# EAGLE board Virtube-Mark2 (EAGLE 7.7.0), part 1 of 2
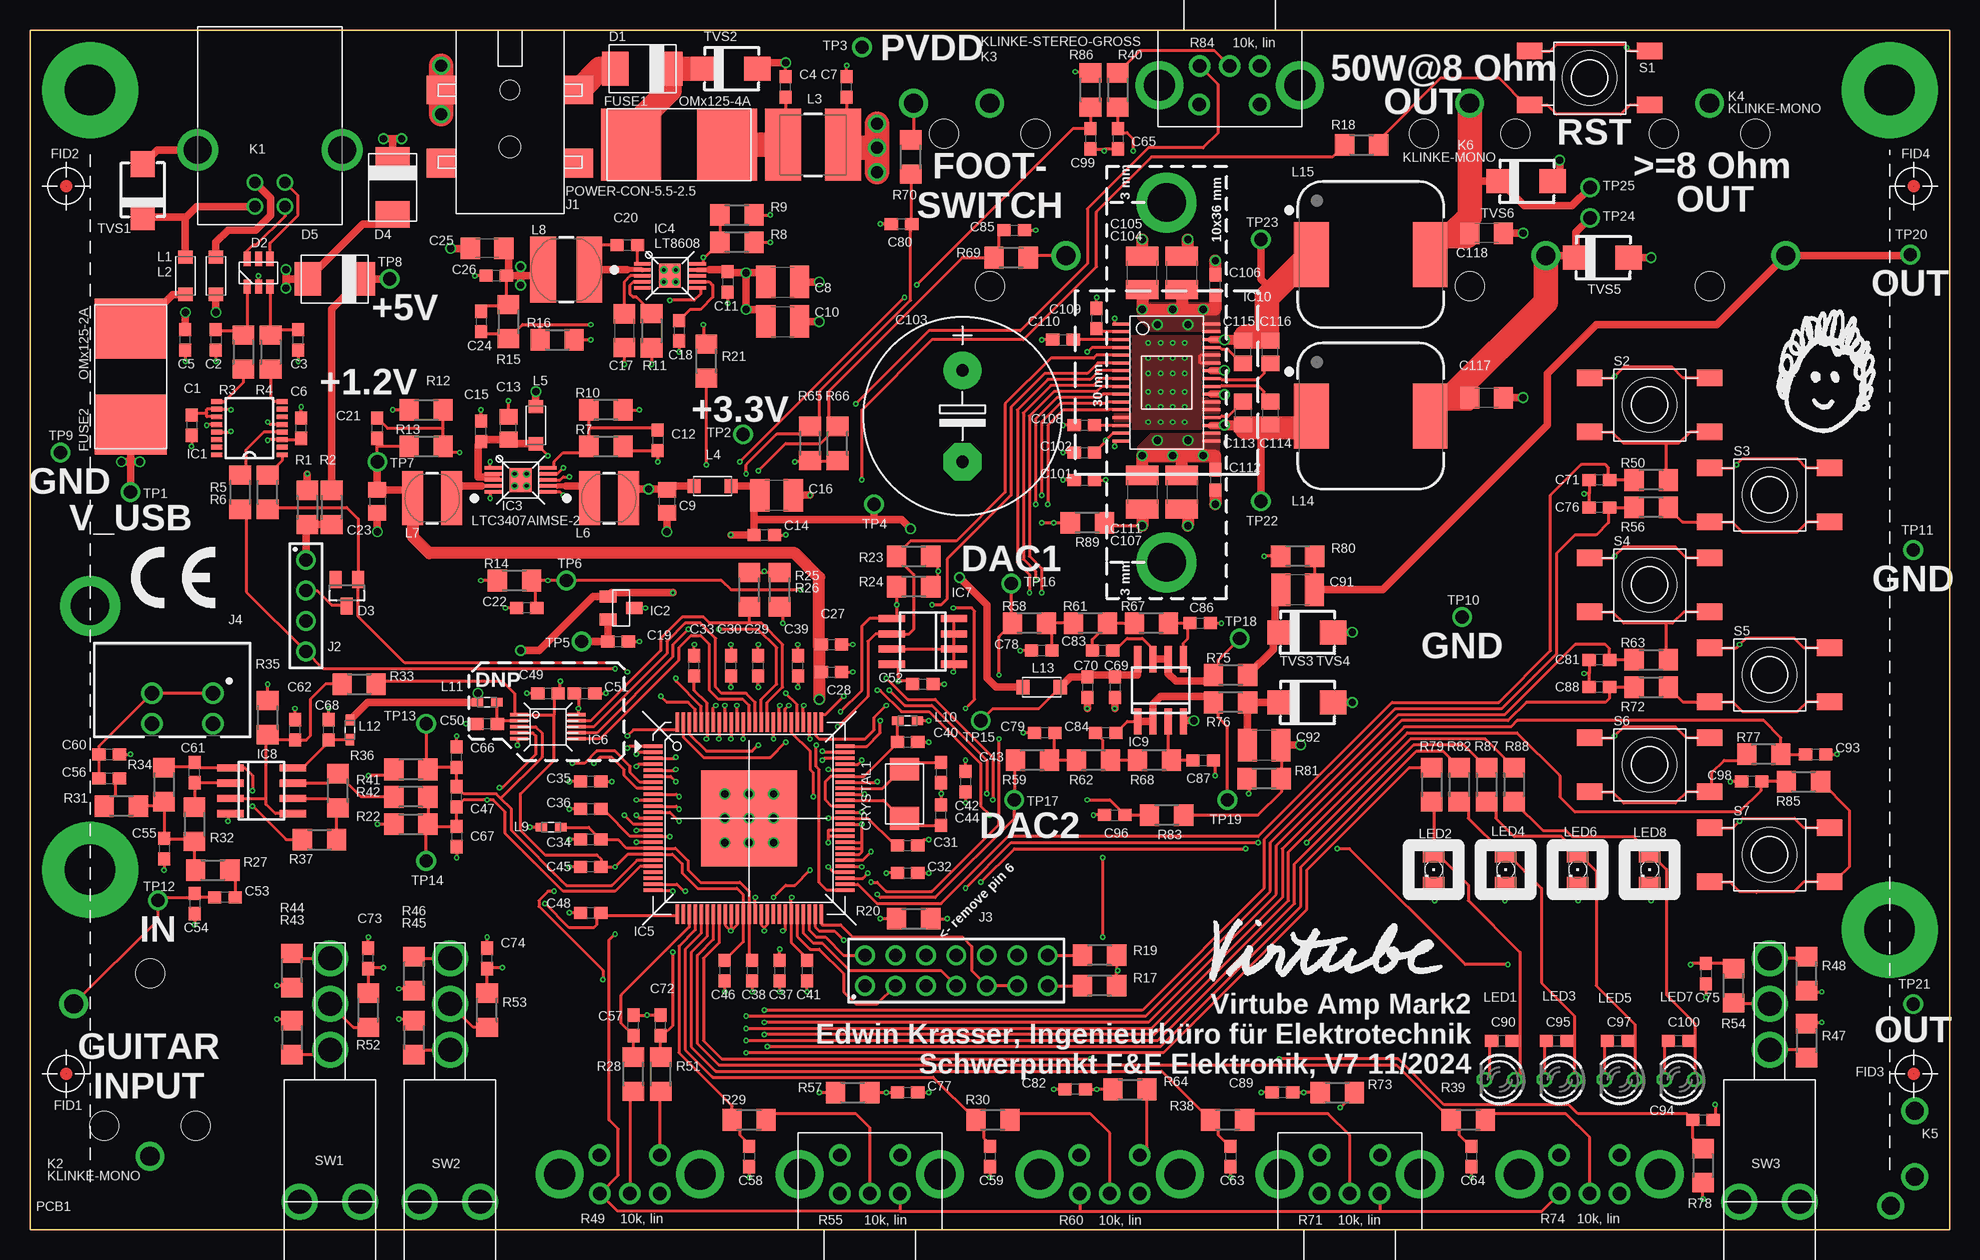
[diagram p0: board, top side]
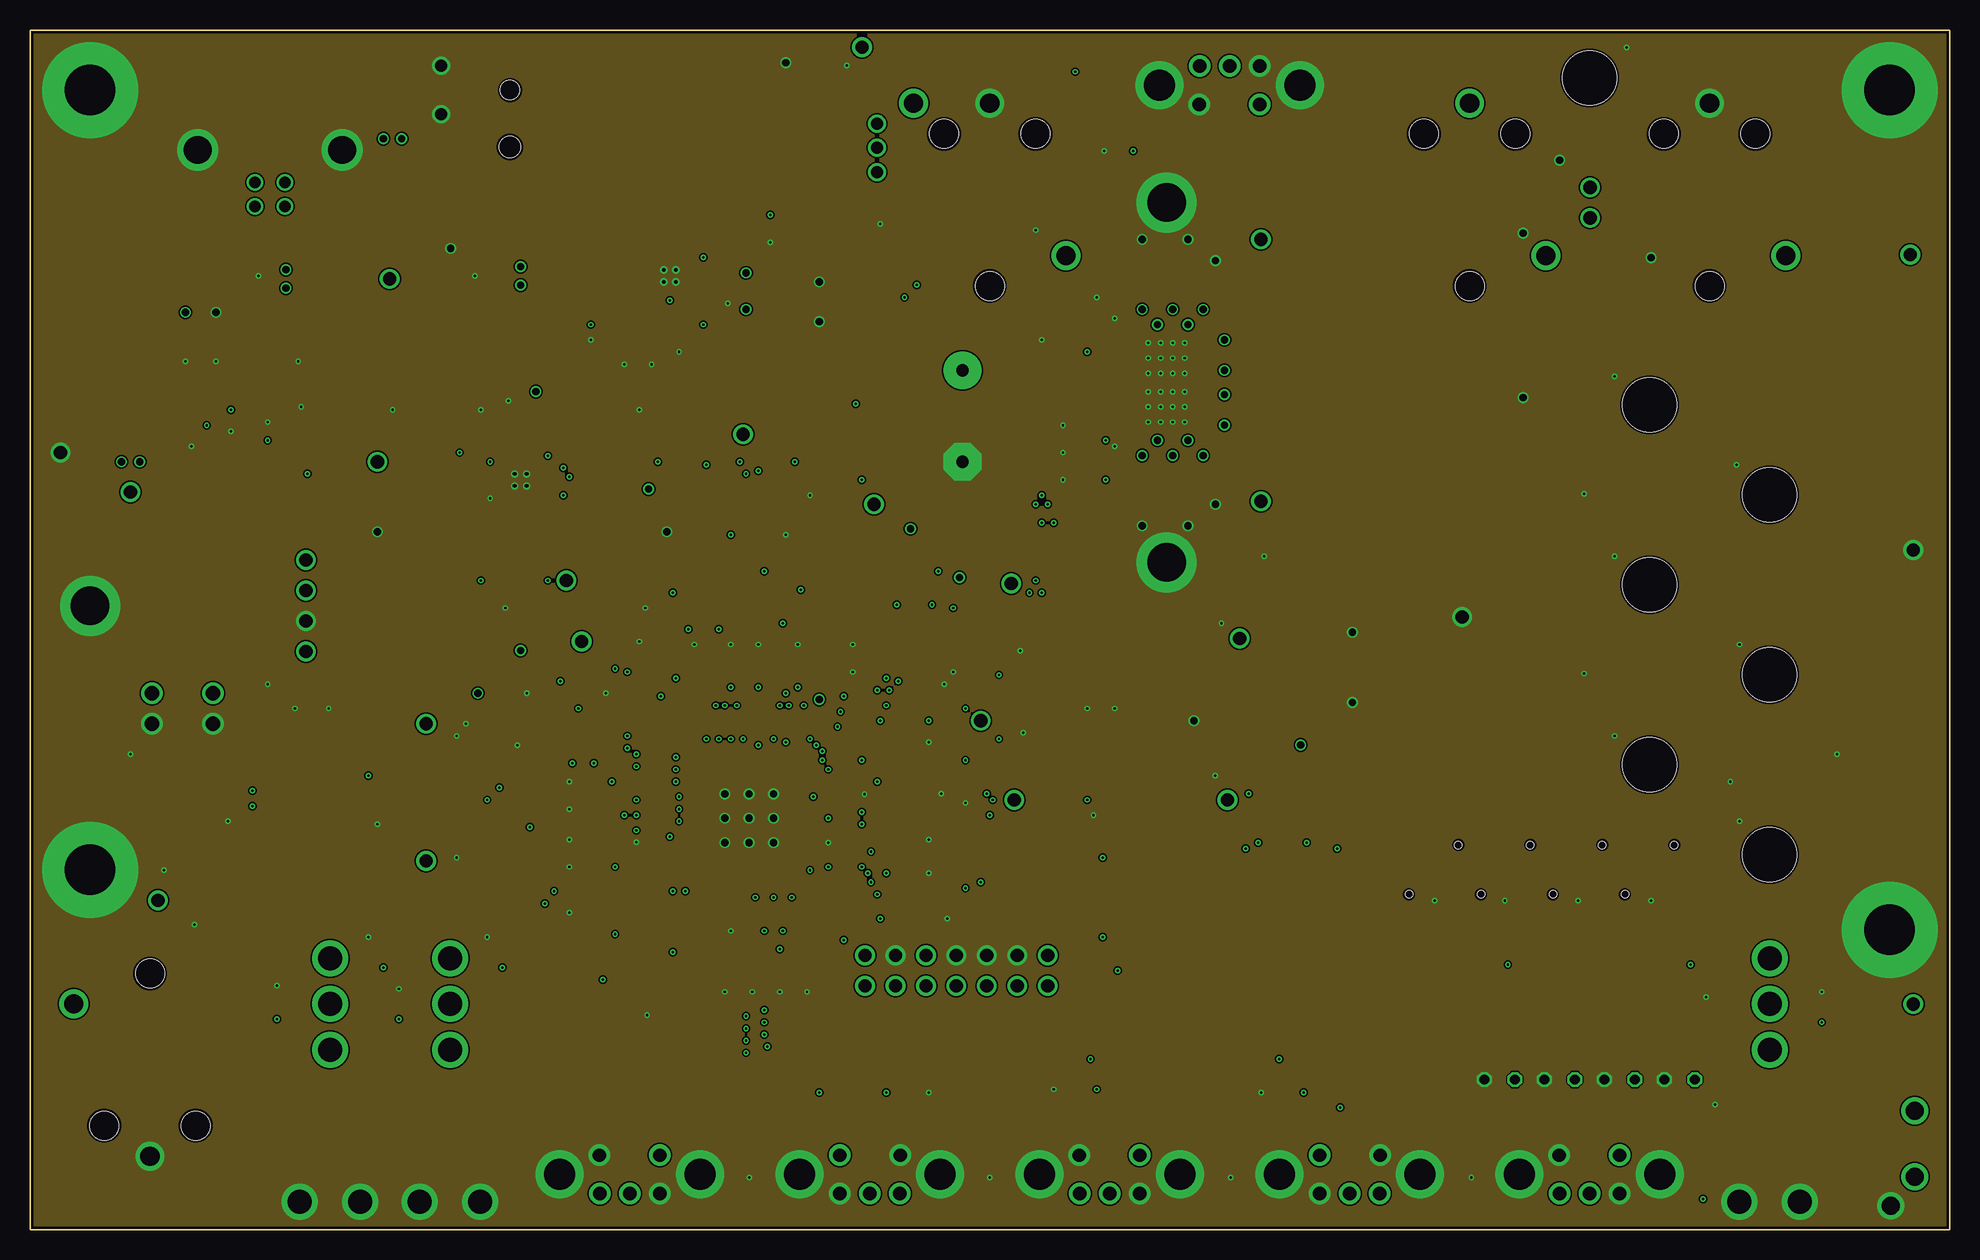
[diagram p1: board, inner layer GND]
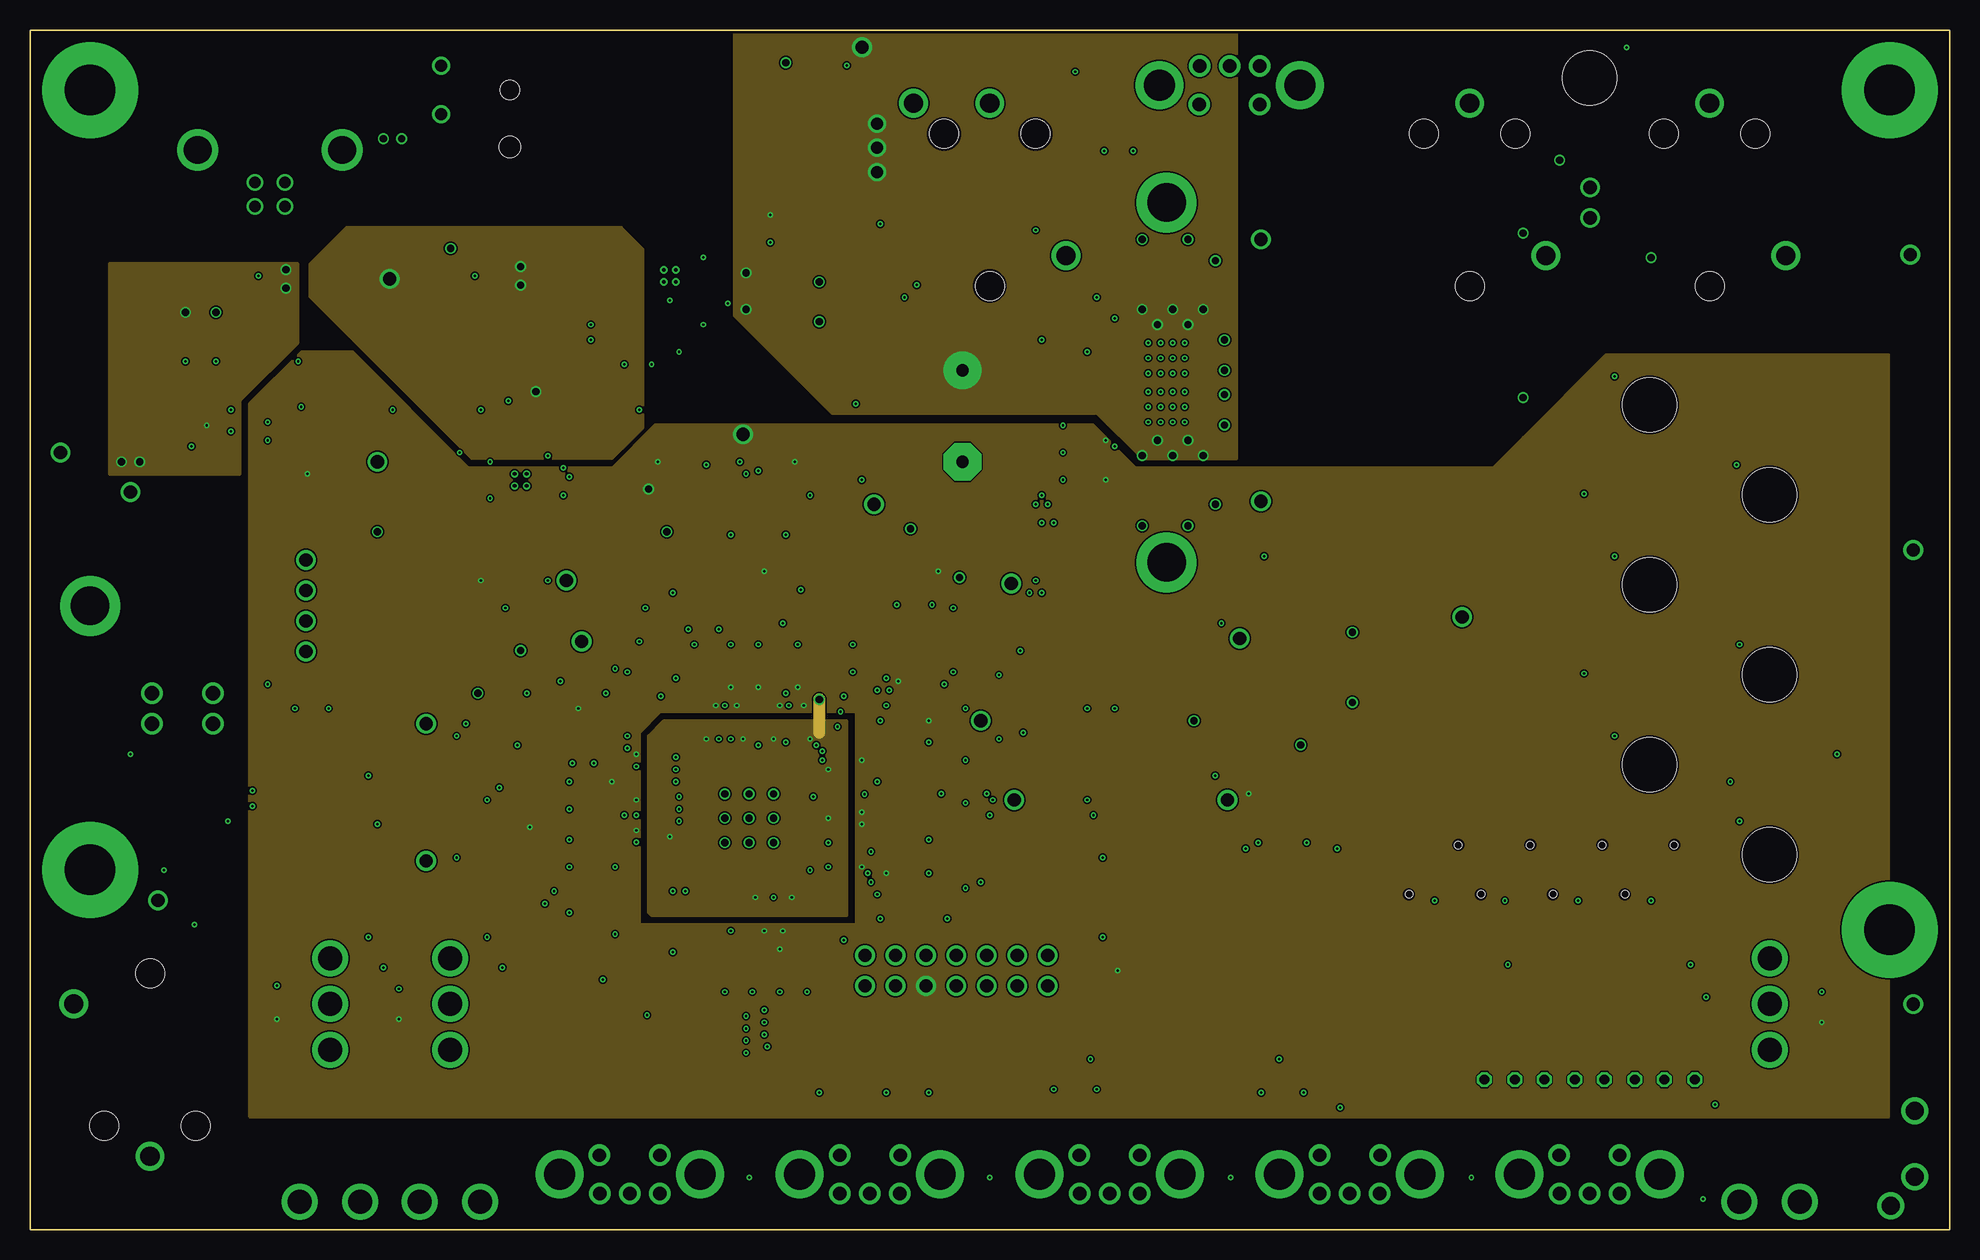
[diagram p2: board, inner layer PWR]
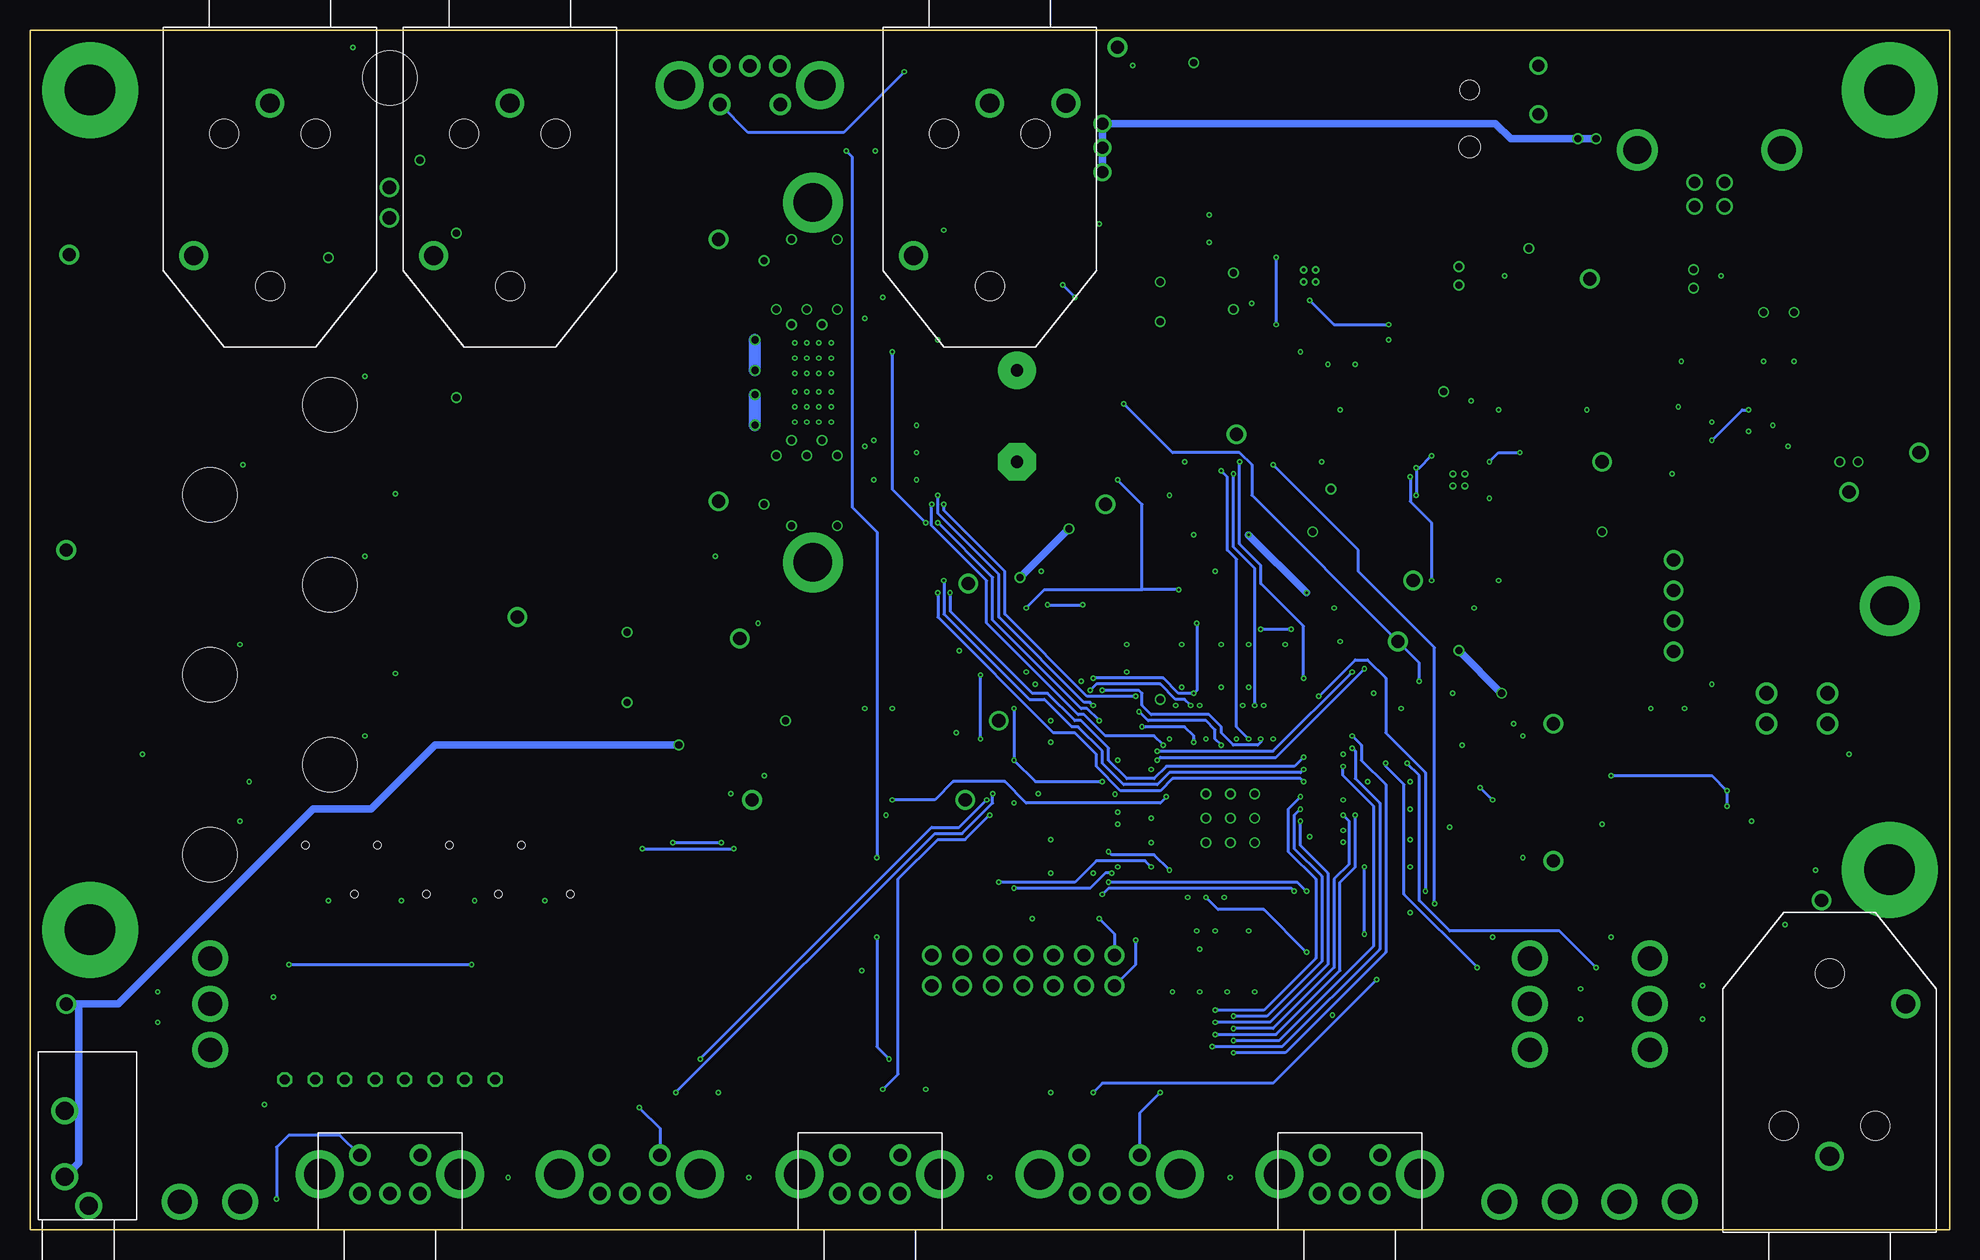
[diagram p3: board, bottom side, seen from below]

Size 160 x 100 mm. Coordinates in mm from the lower left corner, seen from the top.
Copper layers (1+2*3+16): Top 0.018mm / dielectric 0.36mm / GND 0.035mm / dielectric 0.71mm / PWR 0.035mm / dielectric 0.36mm / Bottom 0.018mm
Design rules "Multi-CB_4L_125um-Tracks_OL35um-IL35um": minimum track width 0.125mm, minimum drill 0.2mm, track to track 0.125mm, track to pad 0.125mm, pad to pad 0.125mm, via to via 0.125mm, smd to smd 0mil, copper to edge 0.2mm, drill to drill 0.2mm, minimum pad ring 0.125mm, minimum via ring 0.125mm, stop-mask expansion 2mil, vias tented up to drill 0.45mm, thermal gap 0.2mm
Holes 4.5 mm at 145,61.25 135,53.75 135,38.75 145,31.25 145,46.25 135,68.75 130,96

## Footprints (pad centres in the part's own frame; a part is rotated, then mirrored left to right if it is on the bottom)
C0603 = smd 1.1 x 1: 1 -0.85,0; 2 0.85,0
C1210 = smd 1.6 x 2.7: 1 -1.4,0; 2 1.4,0
C0805 = smd 1.3 x 1.5: 1 -0.95,0; 2 0.95,0
C1206 = smd 1.6 x 1.8: 1 -1.4,0; 2 1.4,0
E7,5-16 = drill 1.016 pad 3.15: + -3.81,0 | drill 1.016 pad 3.15 octagon: - 3.81,0
CRYSTAL5032 = smd 1.9 x 2.4: P$1 -2.05,0; P$2 2.05,0
SMB-CASE403A03 = smd 2.2 x 2.8: A -2.25,0; C 2.25,0
SOT23-6L = smd 0.6 x 1.2: 1 -0.95,-1.15; 2 0,-1.15; 3 0.95,-1.15; 4 0.95,1.15; 5 0,1.15; 6 -0.95,1.15
SOT23 = smd 1 x 1.4: 1 -0.95,-1.1; 2 0.95,-1.1; 3 0,1.1
OMH125 = smd 5 x 6: P$1 -4,0; P$2 4,0
SSOP16 = smd 0.914 x 0.406: 1 -2.718,2.223; 2 -2.718,1.587; 3 -2.718,0.953; 4 -2.718,0.318; 5 -2.718,-0.318; 6 -2.718,-0.953; 7 -2.718,-1.587; 8 -2.718,-2.223; 9 2.718,-2.223; 10 2.718,-1.587; 11 2.718,-0.953; 12 2.718,-0.318; 13 2.718,0.318; 14 2.718,0.953; 15 2.718,1.587; 16 2.718,2.223
SOT23' = smd 1 x 1.4: 1 0.95,1.1; 2 -0.95,1.1; 3 0,-1.1
MSOP10+PAD = smd 0.3 x 1.4: 1 -1,-2.3; 2 -0.5,-2.3; 3 0,-2.3; 4 0.5,-2.3; 5 1,-2.3; 6 1,2.3; 7 0.5,2.3; 8 0,2.3; 9 -0.5,2.3; 10 -1,2.3 | smd 2 x 1.8: PAD 0,0 | drill 0.3 pad 0.6: PAD1 -0.5,-0.5; PAD2 0.5,-0.5; PAD3 0.5,0.5; PAD4 -0.5,0.5
PQFP100_THERMAL = smd 1.6 x 0.3: 1 -8,6; 2 -8,5.5; 3 -8,5; 4 -8,4.5; 5 -8,4; 6 -8,3.5; 7 -8,3; 8 -8,2.5; 9 -8,2; 10 -8,1.5; 11 -8,1; 12 -8,0.5; 13 -8,0; 14 -8,-0.5; 15 -8,-1; 16 -8,-1.5; 17 -8,-2; 18 -8,-2.5; 19 -8,-3; 20 -8,-3.5; 21 -8,-4; 22 -8,-4.5; 23 -8,-5; 24 -8,-5.5; 25 -8,-6; 51 8,-6; 52 8,-5.5; 53 8,-5; 54 8,-4.5; 55 8,-4; 56 8,-3.5; 57 8,-3; 58 8,-2.5; 59 8,-2; 60 8,-1.5; 61 8,-1; 62 8,-0.5; 63 8,0; 64 8,0.5; 65 8,1; 66 8,1.5; 67 8,2; 68 8,2.5; 69 8,3; 70 8,3.5; 71 8,4; 72 8,4.5; 73 8,5; 74 8,5.5; 75 8,6 | smd 0.3 x 1.6: 26 -6,-8; 27 -5.5,-8; 28 -5,-8; 29 -4.5,-8; 30 -4,-8; 31 -3.5,-8; 32 -3,-8; 33 -2.5,-8; 34 -2,-8; 35 -1.5,-8; 36 -1,-8; 37 -0.5,-8; 38 0,-8; 39 0.5,-8; 40 1,-8; 41 1.5,-8; 42 2,-8; 43 2.5,-8; 44 3,-8; 45 3.5,-8; 46 4,-8; 47 4.5,-8; 48 5,-8; 49 5.5,-8; 50 6,-8; 76 6,8; 77 5.5,8; 78 5,8; 79 4.5,8; 80 4,8; 81 3.5,8; 82 3,8; 83 2.5,8; 84 2,8; 85 1.5,8; 86 1,8; 87 0.5,8; 88 0,8; 89 -0.5,8; 90 -1,8; 91 -1.5,8; 92 -2,8; 93 -2.5,8; 94 -3,8; 95 -3.5,8; 96 -4,8; 97 -4.5,8; 98 -5,8; 99 -5.5,8; 100 -6,8 | smd 8 x 8: TH 0,0
VSSOP10 = smd 1.5 x 0.3: 1 -2.4,1; 2 -2.4,0.5; 3 -2.4,0; 4 -2.4,-0.5; 5 -2.4,-1; 6 2.4,-1; 7 2.4,-0.5; 8 2.4,0; 9 2.4,0.5; 10 2.4,1
SO08 = smd 0.6 x 2.2: 1 -1.905,-2.6; 2 -0.635,-2.6; 3 0.635,-2.6; 4 1.905,-2.6; 5 1.905,2.6; 6 0.635,2.6; 7 -0.635,2.6; 8 -1.905,2.6
TSSOP32-TI-NO-TOP-STOP = smd 1.5 x 0.25: 1 -3.75,4.875; 2 -3.75,4.225; 3 -3.75,3.575; 4 -3.75,2.925; 5 -3.75,2.275; 6 -3.75,1.625; 7 -3.75,0.975; 8 -3.75,0.325; 9 -3.75,-0.325; 10 -3.75,-0.975; 11 -3.75,-1.625; 12 -3.75,-2.275; 13 -3.75,-2.925; 14 -3.75,-3.575; 15 -3.75,-4.225; 16 -3.75,-4.875; 17 3.75,-4.875; 18 3.75,-4.225; 19 3.75,-3.575; 20 3.75,-2.925; 21 3.75,-2.275; 22 3.75,-1.625; 23 3.75,-0.975; 24 3.75,-0.325; 25 3.75,0.325; 26 3.75,0.975; 27 3.75,1.625; 28 3.75,2.275; 29 3.75,2.925; 30 3.75,3.575; 31 3.75,4.225; 32 3.75,4.875
POWER-CON-2.5-5.5 = smd 2.4 x 2.4: 1 0,5.75; 1A 6.1,5.75; 2 0,-5.75; 3 6.1,-5.75 | hole 1.6: 0,0 | hole 1.8: 4.75,0
61300411121 = drill 1.1: 1 -3.81,0; 2 -1.27,0; 3 1.27,0; 4 3.81,0
61301421121 = drill 1.1: 1 -7.62,-1.27; 2 -7.62,1.27; 3 -5.08,-1.27; 4 -5.08,1.27; 5 -2.54,-1.27; 6 -2.54,1.27; 7 0,-1.27; 8 0,1.27; 9 2.54,-1.27; 10 2.54,1.27; 11 5.08,-1.27; 12 5.08,1.27; 13 7.62,-1.27; 14 7.62,1.27
691403900002B = drill 1.2: 1 -1.27,2.54; 2 1.27,2.54; A1 -1.27,-2.54; A2 1.27,-2.54
61400416121 = drill 0.92: 1 -1.25,-4.71; 2 1.25,-4.71; 3 1.25,-2.71; 4 -1.25,-2.71 | drill 2.3: Z1 6.02,0; Z2 -6.02,0
KLINKE-GROSS-MONO = drill 1.6: GND 0,-8.89; TIP 6.35,3.81 | hole 2.4: 0,6.35; -3.81,-6.35; 3.81,-6.35
KLINKE-GROSS-STEREO = drill 1.6: GND 0,-8.89; RING -6.35,-8.89; TIP 6.35,3.81 | hole 2.4: 0,6.35; -3.81,-6.35; 3.81,-6.35
KLINKE-KLEIN-STEREO = drill 1.5: 1 0.9,0; 2 -1.1,2.4; 3 -1.1,7.9
WE-CBF_1206(W=4.2) = smd 1.1 x 1.2: 1 -1.55,0; 2 1.55,0
WE-SUKW_7427511 = smd 3 x 6: 1 -2.5,0; 2 2.5,0
WE-PD2_4532 = smd 1.75 x 4.5: 1 -1.625,0; 2 1.625,0
WE-PD2_5848 = smd 2.15 x 5.5: 1 -1.925,0; 2 1.925,0
WE-CBF_0603(W=2.6) = smd 0.95 x 0.7: 1 -0.825,0; 2 0.825,0
WE-PD_1210 = smd 5.4 x 2.9: 1 0,-4.95; 2 0,4.95
LED3MM = drill 0.813 octagon: A -1.27,0; K 1.27,0
1206 = smd 1.6 x 1.803: A -1.422,0; C 1.422,0
LIGHTPIPE_3MM = hole 0.6: -2.05,-2.05; 2.05,2.05
PCB-160X100-4-ALT1 = drill 4.2 pad 8: P$1 5,30; P$2 155,25; P$3 155,95; P$4 5,95
R1206 = smd 1.6 x 1.803: 1 -1.422,0; 2 1.422,0
R-POT1-KEY = drill 1.1 pad 1.778: 1 -2.5,0; 2 0,0; 3 2.5,0; K1 -2.5,3.2; K2 2.54,3.2 | drill 2.6 pad 4: L1 -5.85,1.6; L2 5.85,1.6
LSH_SCHURTER = smd 2.1 x 1.4: A1 -5,2.25; A2 5,2.25; B1 -5,-2.25; B2 5,-2.25
SPDT-KIPPSCHALTER = drill 2: L1 -2.54,-12.7; L2 2.54,-12.7; P$1 0,0; P$2 0,3.81; P$3 0,7.62
TESTPOINT = drill 1.1: P$1 0,0
SMA-DO214 = smd 2.2 x 2: A 2.2,0; C -2.2,0

## Placement (x,y rotation side)
C1  100n  [C0603]  13.46,67.06 270 top
C2  47p  [C0603]  15.49,74.17 270 top
C3  47p  [C0603]  22.35,74.17 90 top
C4  10n  [C0603]  62.99,95.25 90 top
C5  100n  [C0603]  12.95,74.17 90 top
C6  100n  [C0603]  22.61,66.8 90 top
C7  10n  [C0603]  68.07,95.25 90 top
C8  10u, 50V  [C1210]  62.74,78.99 0 top
C9  10u, 16V  [C0805]  53.09,60.71 270 top
C10  10u, 50V  [C1210]  62.74,75.69 0 top
C11  100n  [C0603]  58.17,78.99 270 top
C12  22p  [C0603]  52.32,65.79 270 top
C13  10u, 16V  [C0805]  39.88,66.8 90 top
C14  100n  [C0603]  61.21,57.91 0 top
C15  100n  [C0603]  37.59,66.55 90 top
C16  100u  [C1210]  62.23,61.21 0 top
C17  10u  [C1206]  49.53,74.93 270 top
C18  100n  [C0603]  54.1,74.93 270 top
C19  100n  [C0603]  49.02,49.02 0 top
C20  100n  [C0603]  49.78,82.04 180 top
C21  22p  [C0603]  28.96,66.8 90 top
C22  1n  [C0603]  41.4,51.82 180 top
C23  10u, 16V  [C0805]  28.96,60.71 270 top
C24  10p  [C0603]  37.59,75.69 270 top
C25  10u  [C1206]  38.1,81.79 180 top
C26  100n  [C0603]  38.86,79.5 180 top
C27  10u  [C0603]  66.8,48.77 0 top
C28  100n  [C0603]  66.8,46.48 0 top
C29  10u  [C0603]  60.71,46.99 90 top
C30  100n  [C0603]  58.42,46.99 90 top
C31  100n  [C0603]  73.15,32 0 top
C32  100n  [C0603]  73.15,29.72 0 top
C33  100n  [C0603]  55.37,46.99 90 top
C34  10u  [C0603]  46.74,32.51 180 top
C35  100n  [C0603]  46.74,37.34 180 top
C36  100n  [C0603]  46.74,35.05 180 top
C37  100n  [C0603]  62.48,21.59 270 top
C38  10u  [C0603]  60.2,21.59 270 top
C39  100n  [C0603]  64.01,46.99 90 top
C40  100n  [C0603]  73.15,40.64 0 top
C41  100n  [C0603]  64.77,21.59 270 top
C42  22p  [C0603]  75.95,38.1 270 top
C43  10n  [C0603]  77.98,37.34 270 top
C44  22p  [C0603]  75.95,34.54 90 top
C45  10u  [C0603]  46.74,30.23 180 top
C46  10u  [C0603]  57.91,21.59 270 top
C47  47p  [C0603]  35.56,36.07 90 top
C48  10n  [C0603]  46.74,26.42 0 top
C49  10u  [C0603]  43.18,44.7 0 top
C50  1u  [C0603]  38.1,42.16 180 top
C51  1u  [C0603]  46.23,44.7 0 top
C52  100n  [C0603]  74.42,45.47 0 top
C53  1u  [C0603]  16.26,27.69 180 top
C54  100p  [C0603]  13.72,27.18 270 top
C55  470p  [C0603]  11.18,31.75 270 top
C56  1u  [C0603]  6.6,37.59 180 top
C57  10n  [C0603]  50.29,17.02 90 top
C58  10n  [C0603]  59.94,6.1 270 top
C59  10n  [C0603]  80.01,6.1 270 top
C60  100p  [C0603]  6.6,39.62 0 top
C61  100p  [C0603]  13.72,38.1 90 top
C62  1u  [C0603]  22.1,41.66 90 top
C63  10n  [C0603]  100.08,6.1 270 top
C64  10n  [C0603]  120.14,6.1 270 top
C65  10n  [C0603]  90.68,90.93 270 top
C66  100p  [C0603]  35.56,39.37 90 top
C67  100p  [C0603]  35.56,32.77 270 top
C68  100n  [C0603]  24.89,41.66 90 top
C69  100n  [C0603]  90.42,45.21 270 top
C70  10u  [C0603]  88.14,45.21 270 top
C71  10n  [C0603]  130.81,62.48 180 top
C72  10n  [C0603]  52.58,17.02 90 top
C73  10n  [C0603]  28.19,22.61 90 top
C74  10n  [C0603]  38.1,22.61 90 top
C75  10n  [C0603]  139.7,21.34 270 top
C76  10n  [C0603]  130.81,60.2 180 top
C77  10n  [C0603]  73.15,11.43 0 top
C78  1n  [C0603]  84.33,48.26 180 top
C79  1n  [C0603]  84.58,41.4 180 top
C80  10n  [C0603]  72.64,83.82 180 top
C81  10n  [C0603]  130.81,47.5 180 top
C82  10n  [C0603]  87.12,11.68 180 top
C83  1n  [C0603]  89.41,48.26 180 top
C84  1n  [C0603]  89.66,41.4 180 top
C85  10n  [C0603]  82.04,83.31 0 top
C86  100p  [C0603]  97.54,50.55 0 top
C87  100p  [C0603]  97.79,39.12 0 top
C88  10n  [C0603]  130.81,45.21 180 top
C89  10n  [C0603]  104.39,11.43 180 top
C90  1n  [C0603]  122.68,15.75 0 top
C91  100u  [C1210]  105.66,53.34 0 top
C92  100u  [C1210]  102.87,40.39 0 top
C93  10n  [C0603]  148.84,39.62 0 top
C94  10n  [C0603]  139.45,9.14 0 top
C95  1n  [C0603]  127.25,15.75 0 top
C96  10u  [C0603]  90.42,34.54 0 top
C97  1n  [C0603]  132.33,15.75 0 top
C98  10n  [C0603]  143.51,37.34 180 top
C99  10n  [C0603]  88.39,90.93 270 top
C100  1n  [C0603]  137.41,15.75 0 top
C101  10u  [C0603]  87.88,62.48 0 top
C102  100n  [C0603]  87.88,64.77 0 top
C103  1000uF, 35V  [E7,5-16]  77.72,67.82 270 top
C104  10u, 50V  [C1210]  96.01,79.76 90 top
C105  10u, 50V  [C1210]  92.71,79.76 90 top
C106  100n  [C0603]  98.81,78.74 90 top
C107  10u, 50V  [C1210]  96.01,61.47 270 top
C108  1u  [C0603]  87.88,67.06 0 top
C109  1u  [C0603]  88.9,75.95 270 top
C110  1u  [C0603]  86.11,74.17 0 top
C111  10u, 50V  [C1210]  92.71,61.47 270 top
C112  100n  [C0603]  98.81,62.48 270 top
C113  470n, 50V  [C0805]  101.09,68.07 270 top
C114  470n, 50V  [C0805]  103.38,68.07 270 top
C115  470n, 50V  [C0805]  101.09,73.15 90 top
C116  470n, 50V  [C0805]  103.38,73.15 90 top
C117  680n, 50V  [C1206]  121.41,69.34 0 top
C118  680n, 50V  [C1206]  121.41,83.06 180 top
CE1  CE-MARKING  [CE-5MM-MIN-SIZE]  10.92,54.36 0 top
CRYSTAL1  NX5032GA-10M  [CRYSTAL5032]  72.9,36.32 270 top
D1  SK54BL  [SMB-CASE403A03]  51.05,96.77 0 top
D2  USBLC6-2  [SOT23-6L]  19.05,79.76 0 top
D3  BAS70  [SOT23]  26.42,53.09 180 top
D4  VS-10BQ040  [SMB-CASE403A03]  30.23,86.87 90 top
D5  VS-10BQ040  [SMB-CASE403A03]  25.4,79.25 0 top
FID1  FIDUCIAL  [FIDUCIAL]  3,13 0 top
FID2  FIDUCIAL  [FIDUCIAL]  3,87 0 top
FID3  FIDUCIAL  [FIDUCIAL]  157,13 0 top
FID4  FIDUCIAL  [FIDUCIAL]  157,87 0 top
FUSE1  OMx125-4A  [OMH125]  54.1,90.42 0 top
FUSE2  OMx125-2A  [OMH125]  8.38,71.12 270 top
IC1  FT230XS  [SSOP16]  18.29,66.8 180 top
IC2  ADR381  [SOT23']  49.28,51.82 90 top
IC3  LTC3407AIMSE-2  [MSOP10+PAD]  40.89,62.48 270 top
IC4  LT8608  [MSOP10+PAD]  53.34,79.5 270 top
IC5  TMS320F28377SPZP  [PQFP100_THERMAL]  59.94,34.29 0 top
IC6  ADS8867IDGS  [VSSOP10]  43.18,41.91 0 top
IC7  24AA64-I/SN  [SO08]  74.42,49.02 90 top
IC8  AD8606  [SO08]  19.3,36.58 270 top
IC9  AD8616  [SO08]  94.23,44.96 0 top
IC10  TAS5828M  [TSSOP32-TI-NO-TOP-STOP]  94.74,70.61 0 top
J1  POWER-CON-5.5-2.5  [POWER-CON-2.5-5.5]  40,95 270 top
J2  61300411121  [61300411121]  23,52 270 top
J3  61301421121  [61301421121]  77.22,21.59 0 top
J4  691403900002B  [691403900002B]  12.7,43.43 270 top
K1  K_USB  [61400416121]  20,90 0 top
K2  KLINKE-MONO  [KLINKE-GROSS-MONO]  10,15 0 bottom
K3  KLINKE-STEREO-GROSS  [KLINKE-GROSS-STEREO]  80,85 180 bottom
K4  KLINKE-MONO  [KLINKE-GROSS-MONO]  140,85 180 bottom
K5  KLINKE-STEREO-KLEIN  [KLINKE-KLEIN-STEREO]  156,2 0 bottom
K6  KLINKE-MONO  [KLINKE-GROSS-MONO]  120,85 180 bottom
L1  600@100M,2A  [WE-CBF_1206(W=4.2)]  12.95,79.5 90 top
L2  600@100M,2A  [WE-CBF_1206(W=4.2)]  15.49,79.5 90 top
L3  416Ohm@100MHz  [WE-SUKW_7427511]  65.28,90.42 0 top
L4  600@100M,2A  [WE-CBF_1206(W=4.2)]  56.9,61.98 180 top
L5  600@100M,2A  [WE-CBF_1206(W=4.2)]  42.16,67.06 90 top
L6  4.7uH  [WE-PD2_4532]  48.26,60.96 0 top
L7  4.7uH  [WE-PD2_4532]  33.53,60.96 180 top
L8  10uH  [WE-PD2_5848]  44.7,80.01 180 top
L9  1k@100M  [WE-CBF_0603(W=2.6)]  43.43,33.53 0 top
L10  1k@100M  [WE-CBF_0603(W=2.6)]  73.15,42.42 180 top
L11  1k@100M  [WE-CBF_0603(W=2.6)]  38.1,43.94 180 top
L12  1k@100M  [WE-CBF_0603(W=2.6)]  26.67,41.66 90 top
L13  600@100M,2A  [WE-CBF_1206(W=4.2)]  84.33,45.21 180 top
L14  10uH  [WE-PD_1210]  111.76,67.82 270 top
L15  10uH  [WE-PD_1210]  111.76,81.28 270 top
LED1  ROT  [LED3MM]  122.5,12.5 180 top
LED2  nb  [1206]  117,30 270 top
LED3  GRÜN  [LED3MM]  127.5,12.5 180 top
LED4  nb  [1206]  123,30 270 top
LED5  GRÜN  [LED3MM]  132.5,12.5 180 top
LED6  nb  [1206]  129,30 270 top
LED7  ROT  [LED3MM]  137.5,12.5 180 top
LED8  nb  [1206]  135,30 270 top
LOGO1  LOGO1  [LOGO1]  149.61,70.1 0 top
LP1  nb  [LIGHTPIPE_3MM]  117,30 0 top
LP2  nb  [LIGHTPIPE_3MM]  123,30 0 top
LP3  nb  [LIGHTPIPE_3MM]  129,30 0 top
LP4  nb  [LIGHTPIPE_3MM]  135,30 0 top
PCB1  PCB-160X100-ALT1  [PCB-160X100-4-ALT1]  0,0 0 top
R1  0  [R1206]  23.11,60.2 90 top
R2  nb  [R1206]  25.15,60.2 90 top
R3  27  [R1206]  17.78,73.15 90 top
R4  27  [R1206]  20.07,73.15 90 top
R5  3.3k  [R1206]  19.81,61.47 270 top
R6  3.3k  [R1206]  17.53,61.47 270 top
R7  1Meg  [R1206]  48.01,65.28 180 top
R8  180k  [R1206]  58.93,84.58 180 top
R9  22k  [R1206]  58.93,82.3 0 top
R10  220k  [R1206]  48.01,68.33 0 top
R11  43k  [R1206]  51.82,74.93 90 top
R12  560k  [R1206]  33.02,68.33 180 top
R13  560k  [R1206]  33.02,65.28 180 top
R14  10k  [R1206]  40.39,54.1 0 top
R15  1Meg  [R1206]  39.88,75.69 90 top
R16  180k  [R1206]  43.94,74.17 180 top
R17  4.7k  [R1206]  89.15,20.32 0 top
R18  100  [R1206]  111,90.42 180 top
R19  4.7k  [R1206]  89.15,22.86 0 top
R20  2.2k  [R1206]  73.66,25.91 180 top
R21  100k  [R1206]  56.39,72.39 270 top
R22  nb/100  [R1206]  31.75,33.78 180 top
R23  3.3k  [R1206]  73.66,56.13 180 top
R24  3.3k  [R1206]  73.66,53.59 0 top
R25  10k  [R1206]  62.48,53.34 270 top
R26  10k  [R1206]  59.94,53.34 270 top
R27  100k  [R1206]  15.24,29.97 180 top
R28  1k  [R1206]  50.29,12.95 270 top
R29  1k  [R1206]  59.94,9.14 0 top
R30  1k  [R1206]  80.26,9.14 0 top
R31  220k  [R1206]  7.62,35.31 0 top
R32  100k  [R1206]  13.72,33.78 90 top
R33  100k  [R1206]  27.43,45.47 180 top
R34  100k  [R1206]  11.18,37.08 90 top
R35  100k  [R1206]  19.81,42.67 90 top
R36  10k  [R1206]  25.65,36.58 270 top
R37  10k  [R1206]  24.13,32.51 180 top
R38  1k  [R1206]  99.82,9.14 0 top
R39  1k  [R1206]  119.89,9.14 0 top
R40  1k  [R1206]  90.68,95 90 top
R41  100  [R1206]  31.75,38.35 0 top
R42  100  [R1206]  31.75,36.07 0 top
R43  nb  [R1206]  21.84,16 90 top
R44  1k  [R1206]  21.84,21.59 270 top
R45  nb  [R1206]  32,16 90 top
R46  1k  [R1206]  32,21.34 270 top
R47  nb  [R1206]  148.08,15.75 90 top
R48  1k  [R1206]  148.08,21.34 270 top
R49  10k, lin  [R-POT1-KEY]  50,3 0 bottom
R50  1k  [R1206]  135.13,62.48 0 top
R51  1k  [R1206]  52.58,12.95 270 top
R52  1k  [R1206]  28.19,18.29 270 top
R53  1k  [R1206]  38.1,18.29 270 top
R54  1k  [R1206]  141.99,20.32 270 top
R55  10k, lin  [R-POT1-KEY]  70,3 0 top
R56  1k  [R1206]  135.13,60.2 0 top
R57  1k  [R1206]  68.58,11.43 180 top
R58  10k  [R1206]  83.31,50.55 0 top
R59  22k  [R1206]  83.57,39.12 0 top
R60  10k, lin  [R-POT1-KEY]  90,3 0 bottom
R61  22k  [R1206]  88.39,50.55 0 top
R62  43k  [R1206]  88.65,39.12 0 top
R63  1k  [R1206]  135.13,47.5 180 top
R64  1k  [R1206]  91.69,11.68 180 top
R65  nb  [R1206]  65.02,65.53 270 top
R66  nb  [R1206]  67.31,65.53 270 top
R67  43k  [R1206]  93.47,50.55 0 top
R68  68k  [R1206]  93.73,39.12 0 top
R69  1k  [R1206]  81.79,81.03 180 top
R70  1k  [R1206]  73.41,89.41 270 top
R71  10k, lin  [R-POT1-KEY]  110,3 0 top
R72  1k  [R1206]  135.13,45.21 180 top
R73  1k  [R1206]  108.97,11.43 180 top
R74  10k, lin  [R-POT1-KEY]  130,3 0 bottom
R75  1  [R1206]  100.08,46.23 0 top
R76  1  [R1206]  100.08,43.94 0 top
R77  1k  [R1206]  144.53,39.62 0 top
R78  1k  [R1206]  139.45,5.33 90 top
R79  1k  [R1206]  116.84,37.08 90 top
R80  10k  [R1206]  105.66,56.13 0 top
R81  10k  [R1206]  102.87,37.59 0 top
R82  1k  [R1206]  119.13,37.08 90 top
R83  2.2k  [R1206]  94.74,34.54 0 top
R84  10k, lin  [R-POT1-KEY]  100,97 180 top
R85  1k  [R1206]  147.83,37.34 180 top
R86  1k  [R1206]  88.39,95 270 top
R87  1k  [R1206]  121.41,37.08 90 top
R88  1k  [R1206]  123.7,37.08 90 top
R89  3.3k  [R1206]  88.14,58.93 0 top
S1  LSH_SCHURTER  [LSH_SCHURTER]  130,96 0 top
S2  LSH_SCHURTER  [LSH_SCHURTER]  135,68.75 0 top
S3  LSH_SCHURTER  [LSH_SCHURTER]  145,61.25 0 top
S4  LSH_SCHURTER  [LSH_SCHURTER]  135,53.75 0 top
S5  LSH_SCHURTER  [LSH_SCHURTER]  145,46.25 0 top
S6  LSH_SCHURTER  [LSH_SCHURTER]  135,38.75 0 top
S7  LSH_SCHURTER  [LSH_SCHURTER]  145,31.25 0 top
SW1  SPDT  [SPDT-KIPPSCHALTER]  25,15 0 top
SW2  SPDT  [SPDT-KIPPSCHALTER]  35,15 0 top
SW3  SPDT  [SPDT-KIPPSCHALTER]  145,15 0 top
TP1  TESTPOINT  [TESTPOINT]  8.38,61.47 0 top
TP2  TESTPOINT  [TESTPOINT]  59.44,66.29 0 top
TP3  TESTPOINT  [TESTPOINT]  69.34,98.55 0 top
TP4  TESTPOINT  [TESTPOINT]  70.36,60.45 0 top
TP5  TESTPOINT  [TESTPOINT]  45.97,49.02 0 top
TP6  TESTPOINT  [TESTPOINT]  44.7,54.1 0 top
TP7  TESTPOINT  [TESTPOINT]  28.96,64.01 0 top
TP8  TESTPOINT  [TESTPOINT]  29.97,79.25 0 top
TP9  TESTPOINT  [TESTPOINT]  2.54,64.77 0 top
TP10  TESTPOINT  [TESTPOINT]  119.38,51.05 0 top
TP11  TESTPOINT  [TESTPOINT]  156.97,56.64 0 top
TP12  TESTPOINT  [TESTPOINT]  10.67,27.43 0 top
TP13  TESTPOINT  [TESTPOINT]  33.02,42.16 0 top
TP14  TESTPOINT  [TESTPOINT]  33.02,30.73 0 top
TP15  TESTPOINT  [TESTPOINT]  79.25,42.42 0 top
TP16  TESTPOINT  [TESTPOINT]  81.79,53.85 0 top
TP17  TESTPOINT  [TESTPOINT]  82.04,35.81 0 top
TP18  TESTPOINT  [TESTPOINT]  100.84,49.28 0 top
TP19  TESTPOINT  [TESTPOINT]  99.82,35.81 0 top
TP20  TESTPOINT  [TESTPOINT]  156.72,81.28 0 top
TP21  TESTPOINT  [TESTPOINT]  156.97,18.8 0 top
TP22  TESTPOINT  [TESTPOINT]  102.62,60.71 0 top
TP23  TESTPOINT  [TESTPOINT]  102.62,82.55 0 top
TP24  TESTPOINT  [TESTPOINT]  130.05,84.33 0 top
TP25  TESTPOINT  [TESTPOINT]  130.05,86.87 0 top
TVS1  SMAJ5.0A  [SMA-DO214]  9.4,86.61 90 top
TVS2  SMAJ33A  [SMA-DO214]  58.42,96.77 0 top
TVS3  SMAJ5.0A  [SMA-DO214]  106.43,49.78 0 top
TVS4  SMAJ5.0A  [SMA-DO214]  106.43,43.94 0 top
TVS5  SMAJ33A  [SMA-DO214]  131.06,81.03 0 top
TVS6  SMAJ33A  [SMA-DO214]  124.71,87.38 0 top
U$1  [VIRTUBE]  106.93,22.35 0 top

## Library data of the parts
C1-C15 C17-C48 C52-C90 C93-C102 C104-C118 R3-R17 R19-R21 R23-R42 R44 R46 R48 R50-R54 R56-R59 R61-R64 R67-R70 R72 R73 R75-R83 R85-R89 = rcl
C16 C91 C92 = rcl; MF: TayioYuden; MPN: LMK325ABJ107MMHP
C49-C51 R1 R2 R18 R22 R43 R45 R47 R65 R66 = rcl; DNP: T
C103 = rcl; DK: 1189-35YXS1000MEFC16X16-ND; MF: Rubycon; MPN: 35YXS1000MEFC16X16
CE1 FID1-FID4 IC6 LOGO1 LP1-LP4 PCB1 TP1-TP25 = ibek; DNP: T
CRYSTAL1 = ibek; MF: NDKAmerica; MPN: NX5032GA-10.000M-STD-CSU-1
D1 = ibek; MF: Panjit International Inc.; MPN: SK54BL_R1_00001
D2 = ibek; MF: ST; MPN: USBLC6-2SC6
D3 = diode; DK: BAS70-00-E3-08; DNP: T; MF: Vishay; MPN: BAS70-00-E3-08
D4 D5 = ibek; MF: Vishay; MPN: VS-10BQ040-M3/5BT
FUSE1 = ibek; DK: 486-1991-ND; MF: SCHURTER; MPN: 0031.7701.11; MPN2: 3404.0016.11
FUSE2 = ibek; DK: 486-1991-ND; MF: SCHURTER; MPN: 0031.7701.11; MPN2: 3404.0012.11
IC1 = ftdichip; MF: FTDI; MPN: FT230XS
IC2 = ibek; DK: ADR381ARTZ-REEL7; MF: AnalogDevices; MPN: ADR381ARTZ
IC3 = ibek; DK: LTC3407AIMSE-2#PBF-ND; MF: AnalogDevices; MPN: LTC3407AIMSE-2#PBF
IC4 = ibek; MF: AnalogDevices; MPN: LT8608IMSE
IC5 = ibek; MF: TexasInstruments; MPN: TMS320F28377SPZP
IC7 = ibek; MF: Microchip; MPN: 24AA64-I/SN
IC8 = ibek; DK: AD8606ARZ-ND; MF: AnalogDevices; MPN: AD8606ARZ
IC9 = ibek; DK: AD8616ARZ-ND; MF: AnalogDevices; MPN: AD8616ARZ
IC10 = ibek; MF: TexasInstruments; MPN: TAS5828MDADR
J1 = sst; DK: CP-002BHPJCT-ND; MF: CUI Devices; MPN: PJ-002BH-SMT-TR
J2 = Eagle_WR-PHD (rev22a); DATASHEET-URL: https://www.we-online.com/redexpert/spec/61300411121?ae; DNP: T; GENDER: Pin Header; IR: 3A; MF: WürthElektronik; MOUNT: THT; MPN: 61300411121; PACKAGING: Bag; PART-NUMBER: 61300411121; PINS: 4; PITCH: 2.54mm; ROWS: Single; TYPE: Straight
J3 = Eagle_WR-PHD (rev22a); DATASHEET-URL: https://www.we-online.com/redexpert/spec/61301421121?ae; GENDER: Pin Header; IR: 3A; MF: WürthElektronik; MOUNT: THT; MPN: 61301421121; PACKAGING: Bag; PART-NUMBER: 61301421121; PINS: 14; PITCH: 2.54mm; ROWS: Dual; TYPE: Board Stacker
J4 = Eagle_WR-TBL Spring Clamp (rev23b); DATASHEET-URL: https://www.we-online.com/redexpert/spec/691403900002B?ae; IR-UL: 6A; MF: WürthElektronik; MOUNT: THT; MPN: 691403900002B; PART-NUMBER: 691403900002B; PINS: 2; PITCH: 2.54mm; TYPE: Vertical; WIRE: 20 to 26 (AWG) 0.518 to 0.129 (mm²); WORKING-VOLTAGE-UL: 150V (AC)
K1 = Input-Output_Connectors_rev15d; MF: WürthElektronik; MPN: 61400416121
K2 K4 K6 = ibek; DK: SC1121-ND; MF: Switchcraft; MPN: RN111PC
K3 = ibek; DK: ‎SC1123-ND‎; MF: Switchcraft; MPN: RN112BPC
K5 = ibek; DK: SJ1-3533NG; MF: CUI; MPN: SJ1-3533NG
L1 L2 L4 L5 L13 = ibek; DK: 732-1623-1-ND; MF: WürthElektronik; MPN: 74279218
L3 = Eagle_WE-SUKW (rev19a); DATASHEET-URL: https://katalog.we-online.de/pbs/datasheet/7427511.pdf; IR: 5A; MAN: WÜRTH; MF: WürthElektronik; MOUNT: SMT; MPN: 7427511; PART-NUMBER: 7427511; RDC-MAX: 11mOhm; TC: 140?; Z: 272Ohm@25MHz
L6 L7 = Eagle_WE-PD2 (rev23a); DATASHEET-URL: https://www.we-online.com/redexpert/spec/744773047?ae; DK: 732-1252-1-ND; FRES: 50MHz; IR: 1.82A; ISAT: 2.46A; MF: WürthElektronik; MOUNT: SMT; MPN: 744773047; PART-NUMBER: 744773047; RDC-MAX: 0.11Ohm; RDC-TYP: 0.059Ohm
L8 = Eagle_WE-PD2 (rev23a); DATASHEET-URL: https://www.we-online.com/redexpert/spec/74477410?ae; DK: 732-1269-1-ND; FRES: 26MHz; IR: 2.2A; ISAT: 2.5A; MF: WürthElektronik; MOUNT: SMT; MPN: 74477410; PART-NUMBER: 74477410; RDC-MAX: 0.1Ohm; RDC-TYP: 0.078Ohm
L9 L10 L12 = ibek; MF: WürthElektronik; MPN: 74279266
L11 = ibek; DNP: T; MF: WürthElektronik; MPN: 74279266
L14 L15 = Eagle_WE-PD (rev23a); DATASHEET-URL: https://www.we-online.com/redexpert/spec/7447709100?ae; FRES: 21MHz; IR: 7.1A; ISAT: 10.5A; MF: WürthElektronik; MOUNT: SMT; MPN: 7447709100; PART-NUMBER: 7447709100; RDC-MAX: 21mohm; RDC-TYP: 13mohm; SIZE: 1210; VERSION: Standard
LED1 LED7 = led; MF: LiteOn; MPN: LTL-4221NLC
LED2 LED4 LED6 LED8 = led; DNP: T
LED3 LED5 = led; MF: LiteOn; MPN: LTL-4231NLC
R49 R55 R60 R71 R74 R84 = ibek; MF: Bourns; MPN: PRS11R-215F-S103B1
S1 = ibek; DK: 486-3467-ND; DNP: T; MF: Schurter; MPN: 1301.9316
S2-S7 = ibek; DK: 486-3467-ND; MF: Schurter; MPN: 1301.9316
SW1-SW3 = ibek; DK: CKN1454-ND; MF: C&K; MPN: 7101SY9AV2BE
TVS1 TVS3 TVS4 = ibek; MF: Diodes; MPN: SMAJ5.0AQ-13-F
TVS2 TVS5 TVS6 = ibek; MF: WürthElektronik; MPN: SMAJ33A
U$1 = Virtube

## Nets
!FAULT: IC5.77 IC10.11
!MUTE: IC5.76 IC10.10
!PDN: IC5.75 IC10.4 R89.1
!RST: C22.1 C43.1 IC3.8 IC5.69 R14.2 R18.2 TP6.P$1
!TRST: IC5.48 J3.2 R20.2
+1V2: C21.1 C23.1 C27.1 C28.1 C31.1 C33.1 C36.1 C41.1 IC5.16 IC5.39 IC5.45 IC5.63 IC5.71 IC5.78 IC5.84 IC5.89 IC5.95 L7.2 R13.2 TP7.P$1
+2V5A: C19.1 C45.1 C46.1 C49.2 IC2.2 IC5.19 IC5.37 IC6.1 R33.1 R49.3 R55.3 R60.3 R71.3 R74.3 R84.3 TP5.P$1
+3V3: C9.1 C12.2 C29.1 C30.1 C32.1 C35.1 C37.1 C39.1 C51.1 C52.1 C101.2 C102.2 IC5.2 IC5.10 IC5.15 IC5.40 IC5.41 IC5.44 IC5.55 IC5.57 IC5.58 IC5.59 IC5.62 IC5.64 IC5.72 IC5.79 IC5.83 IC5.90 IC5.94 IC6.10 IC7.8 IC10.15 J3.5 L4.2 L6.2 L9.1 L10.1 R1.2 R7.1 R14.1 R17.2 R19.2 R23.1 R24.2 R25.1 R26.1 R43.2 R45.2 R47.2 R65.2 R66.2 R81.1 TP2.P$1
+3V3A: C14.1 C16.1 IC2.1 L4.1 L11.2 L12.2 L13.2 TP4.P$1
+5V: C24.1 C25.1 C26.1 D5.C L5.2 L8.2 R2.2 R15.2 TP8.P$1
+5V_USB: C5.2 D4.A D5.A FUSE2.P$2 IC1.12 TP1.P$1
ADC_!CS: IC5.88 IC6.6
ADC_MISO: IC5.86 IC6.7
ADC_MOSI: IC5.85 IC6.9 R26.2
ADC_SCK: IC5.87 IC6.8
ADCINB0: C57.1 IC5.28 R28.1
ADCINB1: C58.1 IC5.29 R29.1
ADCINB2: C59.1 IC5.30 R30.1
ADCINB3: C63.1 IC5.31 R38.1
ADCINB4: C64.1 IC5.32 R39.1
ADCINB5: C65.1 IC5.33 R40.1
ANALOG_INN: C47.1 C67.1 IC5.21 IC6.4 R22.1 R42.2 TP14.P$1
ANALOG_INP: C47.2 C66.1 IC5.20 IC6.3 R41.2 TP13.P$1
ANALOG_OUT1: IC5.25 R58.1 TP16.P$1
ANALOG_OUT2: IC5.24 R59.1 TP17.P$1
DM_USB: IC1.9 R3.1
DP_USB: IC1.8 R4.1
EMU0: J3.13 R17.1
EMU1: J3.14 R19.1
FS1: C85.1 IC5.91 R66.1 R69.2
FS2: C80.1 IC5.92 R65.1 R70.2
GND: C1.2 C2.2 C3.1 C4.2 C5.1 C6.2 C7.2 C8.2 C9.2 C10.2 C11.2 C13.2 C14.2 C15.2 C16.2 C17.2 C18.2 C19.2 C22.2 C23.2 C25.2 C26.2 C27.2 C28.2 C29.2 C30.2 C31.2 C32.2 C33.2 C34.2 C35.2 C36.2 C37.2 C38.2 C39.2 C40.2 C41.2 C42.2 C43.2 C44.2 C45.2 C46.2 C48.1 C49.1 C50.2 C51.2 C52.2 C54.2 C55.2 C57.2 C58.2 C59.2 C60.2 C62.2 C63.2 C64.2 C65.2 C66.2 C67.2 C68.2 C69.2 C70.2 C71.2 C72.2 C73.2 C74.2 C75.2 C76.2 C77.2 C78.2 C79.2 C80.2 C81.2 C82.2 C85.2 C86.2 C87.2 C88.2 C89.2 C90.1 C93.2 C94.2 C95.1 C96.1 C97.1 C98.2 C99.2 C100.1 C101.1 C102.1 C103.- C104.2 C105.2 C106.2 C107.2 C108.1 C109.1 C110.1 C111.2 C112.2 C117.2 C118.1 D2.2 IC1.5 IC1.13 IC2.3 IC3.5 IC3.PAD IC3.PAD1 IC3.PAD2 IC3.PAD3 IC3.PAD4 IC4.PAD IC4.PAD1 IC4.PAD2 IC4.PAD3 IC4.PAD4 IC5.17 IC5.34 IC5.35 IC5.36 IC5.60 IC5.61 IC5.67 IC5.TH IC6.5 IC7.1 IC7.2 IC7.3 IC7.4 IC7.7 IC8.4 IC9.4 IC10.1 IC10.13 IC10.16 IC10.21 IC10.22 IC10.27 IC10.28 J1.2 J2.3 J3.4 J3.8 J3.10 J3.12 J4.2 J4.A2 K1.Z1 K1.Z2 K2.GND K3.GND K4.GND K5.1 L2.1 LED1.K LED2.C LED3.K LED4.C LED5.K LED6.C LED7.K LED8.C PCB1.P$1 PCB1.P$2 PCB1.P$3 PCB1.P$4 R9.2 R10.2 R11.1 R12.2 R16.1 R20.1 R22.2 R35.2 R44.2 R46.2 R48.2 R49.1 R49.K2 R49.L1 R49.L2 R55.1 R55.K2 R55.L1 R55.L2 R60.1 R60.K2 R60.L1 R60.L2 R71.1 R71.K2 R71.L1 R71.L2 R74.1 R74.K2 R74.L1 R74.L2 R80.1 R84.1 R84.K2 R84.L1 R84.L2 R89.2 S1.A1 S1.A2 S2.A1 S2.A2 S3.A1 S3.A2 S4.A1 S4.A2 S5.A1 S5.A2 S6.A1 S6.A2 S7.A1 S7.A2 SW1.L1 SW1.L2 SW2.L1 SW2.L2 SW3.L1 SW3.L2 TP9.P$1 TP10.P$1 TP11.P$1 TVS1.A TVS2.A TVS3.A TVS4.A TVS5.A TVS6.A
HP_DET: C96.2 IC5.81 R83.1
I2C_SCL: IC5.99 IC7.6 IC10.5 R23.2
I2C_SDA: IC5.98 IC7.5 IC10.6 R24.1
KEY1: C71.1 IC5.52 R50.1
KEY2: C76.1 IC5.9 R56.1
KEY3: C81.1 IC5.11 R63.2
KEY4: C88.1 IC5.12 R72.2
KEY5: C93.1 IC5.13 R77.2
KEY6: C98.1 IC5.14 R85.2
KEY_P1: C72.1 IC5.56 R51.1
KEY_P2: C77.1 IC5.97 R57.1
KEY_P3: C82.1 IC5.93 R64.2
KEY_P4: C89.1 IC5.82 R73.2
KEY_P5: C94.1 IC5.80 R25.2 R78.2
KEY_P6: C99.1 IC5.96 R86.2
LED1: IC5.100 R79.2
LED2: IC5.1 R82.2
LED3: IC5.4 R87.2
LED4: IC5.53 R88.2
MCLKXB: IC5.5 IC10.8
MDXB: IC5.3 IC10.7
MFSXB: IC5.6 IC10.9
N$1: IC3.7 L6.1
N$2: C21.2 IC3.1 R12.1 R13.1
N$3: C12.1 IC3.10 R7.2 R10.1
N$4: IC3.4 L7.1
N$5: K1.1 L1.2 TVS1.C
N$6: D2.6 K1.2
N$7: D2.4 K1.3
N$8: C2.1 D2.1 R3.2
N$9: C3.2 D2.3 R4.2
N$10: C62.1 IC8.3 IC8.5 R33.2 R35.1
N$11: C55.1 R27.2 R31.2 R32.1 R34.1
N$12: C56.1 R31.1
N$13: C53.1 R27.1
N$14: C61.2 IC8.1 R34.2 R37.2 R41.1
N$15: R43.1 SW1.P$1
N$16: K1.4 L2.2
N$17: C91.1 R75.2 TVS3.C
N$18: R44.1 SW1.P$3
N$19: R45.1 SW2.P$1
N$20: R46.1 SW2.P$3
N$21: R47.1 SW3.P$1
N$22: R48.1 SW3.P$3
N$23: C34.1 C38.1 IC5.18 IC5.38 L9.2
N$24: C40.1 IC5.65 IC5.70 L10.2
N$25: C78.1 R58.2 R61.1
N$26: C83.2 R61.2 R67.1
N$27: C50.1 IC6.2 L11.1
N$28: K3.TIP R69.1
N$29: K3.RING R70.1
N$30: C100.2 LED7.A LED8.A R88.1
N$31: C91.2 K4.TIP R80.2 TP20.P$1
N$32: C84.1 IC9.1 IC9.2 R76.1 TP19.P$1
N$33: C79.1 R59.2 R62.1
N$34: C84.2 R62.2 R68.1
N$35: C92.2 K5.2 K5.3 R81.2 R83.2 TP21.P$1
N$36: C92.1 R76.2 TVS4.C
N$37: C87.1 IC9.3 R68.2
N$38: IC8.6 R36.2 R37.1
N$39: C13.1 C15.1 IC3.2 IC3.3 IC3.6 IC3.9 L5.1
N$40: IC8.7 R36.1 R42.1
N$41: C86.1 IC9.5 R67.2
N$42: R52.2 SW1.P$2
N$43: R53.2 SW2.P$2
N$44: R54.2 SW3.P$2
N$45: C68.1 IC8.8 L12.1
N$46: D1.A J1.1
N$47: C69.1 C70.1 IC9.8 L13.1 TP15.P$1
N$48: R74.K1 R78.1
N$49: C90.2 LED1.A LED2.A R79.1
N$50: C95.2 LED3.A LED4.A R82.1
N$51: C97.2 LED5.A LED6.A R87.1
N$52: R49.K1 R51.2
N$53: C118.2 K6.GND L15.2 TP25.P$1 TVS6.C
N$54: C117.1 K6.TIP L14.2 TP24.P$1 TVS5.C
N$55: R55.K1 R57.2
N$56: R60.K1 R64.1
N$57: R71.K1 R73.1
N$58: C61.1 IC8.2 R32.2
N$59: R84.K1 R86.1
N$60: C109.2 IC10.2
N$61: IC1.1 R5.1
N$62: IC1.4 R6.1
N$63: D3.3 J2.2
N$64: R18.1 S1.B1 S1.B2
N$65: R38.2 R71.2
N$66: C56.2 C60.1 J4.1 J4.A1
N$67: R39.2 R74.2
N$68: R40.2 R84.2
N$69: R28.2 R49.2
N$70: R29.2 R55.2
N$71: R30.2 R60.2
N$72: R63.1 S4.B1 S4.B2
N$73: R72.1 S5.B1 S5.B2
N$74: R77.1 S6.B1 S6.B2
N$75: R56.2 S3.B1 S3.B2
N$76: R85.1 S7.B1 S7.B2
N$77: R50.2 S2.B1 S2.B2
N$78: C4.1 FUSE1.P$2 L3.1
N$79: D1.C FUSE1.P$1 TVS2.C
N$80: C24.2 IC4.6 R15.1 R16.2
N$81: C48.2 IC5.26 R21.2
N$82: C20.2 IC4.2 L8.1
N$83: FUSE2.P$1 L1.1
N$84: C110.2 IC10.3
N$85: C108.2 IC10.14
N$86: C113.2 C114.2 IC10.19 IC10.23 L14.1 TP22.P$1
N$87: C53.2 C54.1 K2.TIP TP12.P$1
N$88: C115.2 C116.2 IC10.26 IC10.30 L15.1 TP23.P$1
N$89: C113.1 IC10.20
N$90: C114.1 IC10.24
N$91: C115.1 IC10.29
N$92: C116.1 IC10.25
N$93: J2.1 R1.1 R2.1
N$134: C20.1 IC4.1
N$136: IC4.4 R11.2
N$137: C18.1 IC4.7
N$138: C17.1 IC4.3
OUT1: C83.1 IC9.6 IC9.7 R75.1 TP18.P$1
PD_DET: IC5.51 IC10.12
PVDD: C7.1 C8.1 C10.1 C11.1 C103.+ C104.1 C105.1 C106.1 C107.1 C111.1 C112.1 D4.C IC4.9 IC10.17 IC10.18 IC10.31 IC10.32 L3.2 R8.1 TP3.P$1
RXD: D3.1 IC5.74 R5.2
SWITCH1: C73.1 IC5.7 R52.1
SWITCH2: C74.1 IC5.8 R53.1
SWITCH3: C75.1 IC5.54 R54.1
TCK: IC5.50 J3.9 J3.11
TDI: IC5.46 J3.3
TDO: IC5.47 J3.7
TMS: IC5.49 J3.1
TXD: IC5.73 J2.4 R6.2
VCCIO: C1.1 C6.1 IC1.3 IC1.10 IC1.11
VIN: IC4.10 R8.2 R9.1 R21.1
X1: C42.1 CRYSTAL1.P$1 IC5.68
X2: C44.1 CRYSTAL1.P$2 IC5.66